# Altium PCB ESP32 with USBC.PcbDoc (part 3 of 3)
Units mil, origin at the board's own origin, x right, y up, seen from the top; angles counter-clockwise.
Board outline 2700 x 1000 mil, 4 copper layers (L1, L2, L3, L4), stack 61.583 mil thick; 64 components, 73 nets, 299 pads, 161 vias.
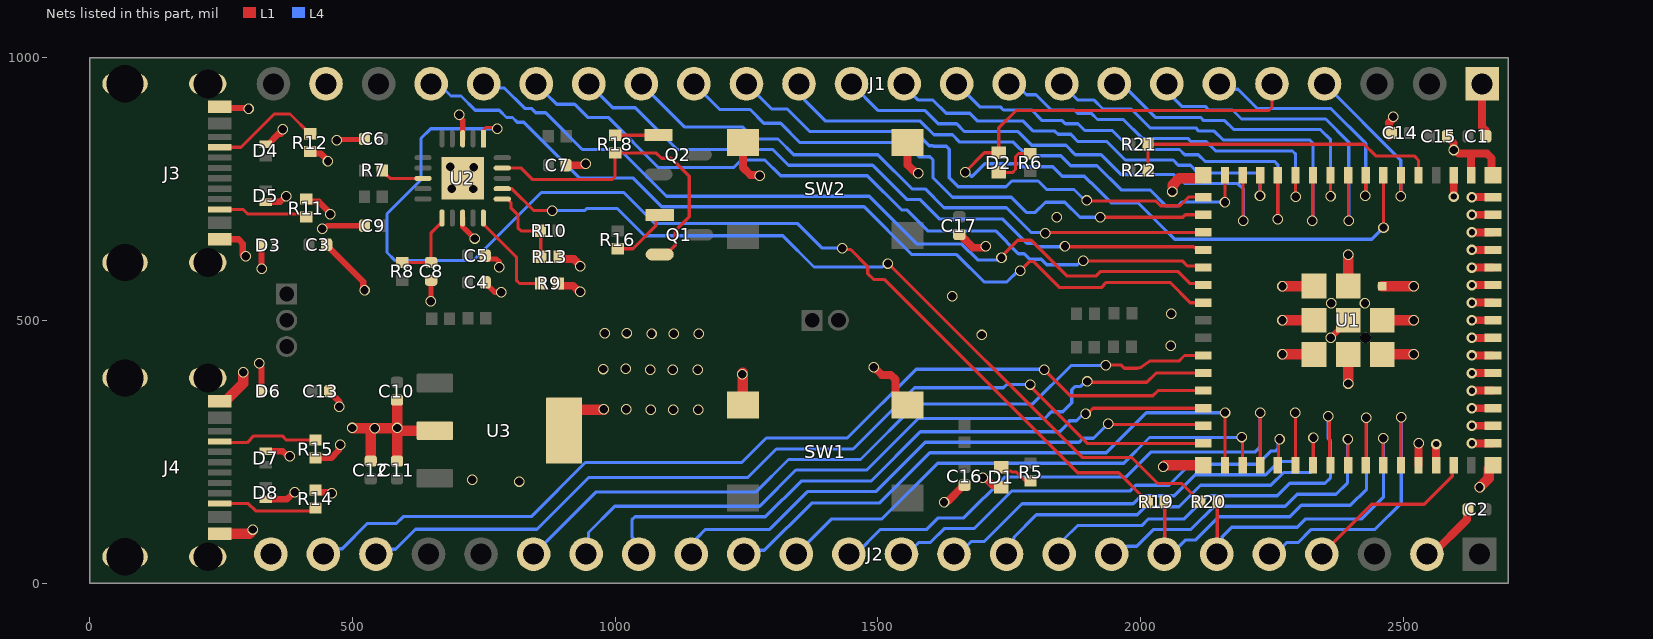
[diagram p4: the nets of this part, all layers, seen from the top]

## Via types
v1: diameter 20, hole 16, L1 to L4, tented both sides, 142 vias
v2: diameter 20, hole 12, L1 to L4, tented both sides, 17 vias
v3: diameter 20, hole 20, L1 to L4, tented both sides, 1 vias
v4: diameter 20, hole 16, L1 to L4, 1 vias

## Nets (pads, with @x,y where several pads share a name; then routed paths per layer and width w, separated by ;. In a path a pad name is that pad's centre, name@x,y a point inside that pad or via, vN(x,y) a via of type N, cw(c..) or ccw(c..) an arc to the next point about the centre after c; other vN are vias at no path point) (continued)
FTDI_USB_P: R7.2 U2.8 | length 84.5
  L1 w6.03: R7.2@557.01,785 557.01,783.82 564.62,776.2 565.8,776.2 572.01,770 579.15,770 U2.8@634.59,770
GND: C1.1 C2.1 C3.1 C4.2 C5.1 C6.1 C7.1 C8.1 C9.1 C10.2 C11.1 C12.1 C13.1 C14.1 C15.1 C16.1 C17.1 D1.1 D3.1 D4.1 D5.2 D6.1 D7.1 D8.2 J1.1 J1.23 J2.2 J2.24 J3.A1B12 J3.B1A12 J3.S1 J3.S2 J3.S3 J3.S4 J4.A1B12 J4.B1A12 J4.S1 J4.S2 J4.S3 J4.S4 R9.2 R11.1 R12.1 R13.1 R14.1 R15.1 SW1.3 SW1.4 SW2.3 SW2.4 U1.1 U1.2 U1.42 U1.43 U1.46 U1.47 U1.48 U1.49 U1.50 U1.51 U1.52 U1.53 U1.54 U1.55 U1.56 U1.57 U1.58 U1.59 U1.60 U1.61 U1.62 U1.63 U1.64 U1.65 U1.66 U1.67 U1.68 U1.69 U1.70 U1.71 U1.72 U1.73 U2.3 U2.13 U2.21 U3.2 U3.4 | length 4192.2
  L1 w10.01: v1@443.63,674.82 447.41,674.82 452.59,680 C9.1@523.07,680 ; v1(470.53,842.78) 471.64,843.89 521.96,843.89 C6.1@523.07,845 ; v1(649.42,535.8) 649.71,536.09 649.71,575.85 C8.1@650,576.14 ; v1(703.41,891.19) 703.41,887.41 710,880.82 U2.3@710,845.41 ; U2.13@710,694.59 710,678 716.24,671.76 732.44,655.56 v1(733.08,655.56) ; C4.2@753,572 753,571.16 770.63,553.53 v1(783.12,553.53) ; C5.1@753,623 753,622.16 758.58,616.58 773.98,616.58 779.84,610.72 v1(779.84,600.94)
  L1 w12: J3.B1A12@247.64,653.94 283.67,653.94 291.8,645.81 291.8,624.02 v1@294.1,621.72 ; J3.A1B12@247.64,905.91 249.54,904 300.62,904 v1(302.52,902.1) ; v1@322.76,418.74 322.76,415.49 327.2,411.04 D6.1@327.2,365 ; D3.1@326.86,642.61 327.07,642.4 327.07,598.42 v1@327.27,598.21 ; D8.2@335,159.41 375.68,159.41 386.32,170.05 v1@389.56,170.05 ; D7.1@335,250.59 367.88,250.59 377.23,241.24 v1@380.48,241.24 ; D5.2@335,724.41 335.89,725.3 362.91,725.3 v1@373.92,736.31 ; D4.1@335,835 339.92,835 359.58,854.66 v1@364.48,854.66 ; R11.1@412.41,730.46 417.04,725.83 436.05,725.83 458.28,703.59 v1@458.28,702.68 ; R12.1@421.18,820.98 424.93,817.23 440.15,817.23 453.18,804.21 v1@453.18,802.08 ; R14.1@430,177.01 431.73,177.01 435.81,172.93 458.88,172.93 v1(461.17,170.63) ; R15.1@430,237.99 459.81,237.99 474.49,252.67 474.49,260.47 v1(476.79,262.77) ; C3.1@451.34,644.03 451.34,642.85 520.98,573.21 520.98,559.3 v1(523.28,557.01) ; C13.1@456.93,365 456.93,363.82 475.34,345.4 v1(475.34,335.48) ; v1(2362,467) U1.61@2395.04,500
  L1 w15: R13.1@893.02,621 893.02,619.82 896.15,616.69 921.62,616.69 926.8,611.51 933.44,604.87 v1(933.44,602.82) v1@933.44,600.77 ; R9.2@895.15,565.69 920.44,565.69 931.59,554.54 v1(934.02,554.54) ; C7.1@906.93,795 941,795 v1(944,798) ; SW2.4@1243.5,838.58 1243.5,790.49 1257.27,776.72 1273.28,776.72 v1(1275,775) ; v1(1492.1,410.27) 1493.45,410.27 1507.57,396.15 1524.7,396.15 1533.48,387.37 1533.48,356.67 1551.57,338.58 SW1.3@1556.5,338.58 ; SW2.3@1556.5,838.58 1556.5,795.79 1565.28,787 1566,787 v1@1570,783 ; v1(1626,154) 1627.72,155.72 1633.4,155.72 1660.69,183.01 1661.87,183.01 C16.1@1665,186.14 ; C17.1@1655,663.07 1656.18,663.07 1681.25,638 v1@1702,638 ; 1710,194.76 1718.46,186.3 1731.3,186.3 D1.1@1735,182.6 ; C14.1@2473.07,850 2473.07,876.21 2481,884.14 v1(2481,887) ; U1.42@2528.9,224.41 v1@2528.9,264.5 ; J2.2@2545,55 2555,55 2621.06,121.06 2621.06,137.98 C2.1@2623.07,140 ; U1.43@2562.36,224.41 v2(2562.36,264.5) ; C15.1@2583.86,850 2583.86,848.82 2596,836.68 v1(2596,824) 2598.44,824 2605.44,817 2627.94,817 ; v2(2595.83,735.5) U1.2@2595.83,775.59 ; U1.1@2629.29,775.59 2628.92,775.96 2628.92,816.02 2627.94,817 ; v2(2630.54,265.75) U1.46@2670.63,265.75 ; v2(2630.54,299.21) U1.47@2670.63,299.21 ; v2(2630.54,332.68) U1.48@2670.63,332.68 ; v2(2630.54,366.14) U1.49@2670.63,366.14 ; v2(2630.54,399.61) U1.50@2670.63,399.61 ; v2(2630.54,433.07) U1.51@2670.63,433.07 ; v2(2630.54,466.54) U1.52@2670.63,466.54 ; v2(2630.54,500) U1.53@2670.63,500 ; v2(2630.54,533.46) U1.54@2670.63,533.46 ; v2(2630.54,566.93) U1.55@2670.63,566.93 ; v2(2630.54,600.39) U1.56@2670.63,600.39 ; v2(2630.54,633.86) U1.57@2670.63,633.86 ; v2(2630.54,667.32) U1.58@2670.63,667.32 ; v2(2630.54,700.79) U1.59@2670.63,700.79 ; v2(2630.54,734.25) U1.60@2670.63,734.25 ; J1.1@2650,950 2650,868 2656,862 2656,850.93 C1.1@2656.93,850 ; U1.65@2662.38,216.16 U1.65@2670.63,224.41 ; U1.62@2670.63,775.59 2668,778.22 2668,808.21 2659.21,817 2627.94,817
  L1 w20: J4.B1A12@247.64,94.09 304.31,94.09 v1@309.6,99.38 ; J4.A1B12@247.64,346.06 258.46,346.06 292.87,380.46 v1@292.87,398.32 ; v1(500.24,295.08) 500.47,294.86 542.68,294.86 v1(542.9,294.63) 543.12,294.86 v1@585.33,294.86 ; C12.1@535,231.93 535,285.65 ; C11.1@585,231.93 585.28,232.21 585.28,294.8 v1@585.33,294.86 ; C10.2@585,348.07 585.28,347.79 585.28,295.36 v1(585.56,295.08) ; U3.2@656.97,290 591.72,290 586.64,295.08 v1(585.56,295.08) ; U3.4@903.03,290 903.03,304.91 927.48,329.36 v1@978.3,329.36 ; v1@1242.85,400.25 1242.85,339.24 SW1.4@1243.5,338.58 ; v1(2043,221) 2046.41,224.41 U1.64@2119.45,224.41 ; v1(2060,745) 2060.77,745.77 2060.77,756.89 2073.72,769.84 2113.7,769.84 U1.63@2119.45,775.59 ; v1(2270,565) v1(2270,565) U1.71@2330.08,564.96 ; v1@2270.04,435.04 U1.73@2330.08,435.04 ; v1(2270,500.04) U1.72@2330.08,500 ; v1(2395.07,379.65) U1.70@2395.05,435.02 ; U1.69@2395.04,564.96 v1@2395.04,625 ; U1.68@2460,435.04 v1@2520.04,435.04 ; U1.67@2460,500 v1@2520.04,500 ; U1.66@2460,564.96 v1@2520.04,564.96 ; v1(2645,182) 2662.38,199.38 U1.65@2662.38,216.16 ; v1@585.33,294.86 v1(585.56,295.08)
  other v1: 310.27,101.77 390.14,172.48 817.82,193.11 728.5,196.85 1700,200 380.67,241.62 2529.05,265.92 1068.05,329.68 1110.64,329.84 1158.26,329.68 978.63,330.88 1021.23,331.04 1241.64,397.29 292.78,400.94 1066.93,406.03 1109.52,406.19 1157.14,406.03 977.51,407.22 1020.11,407.38 322.89,418.55 2270,435.08 2520.08,435 2057.07,451.18 1698.03,472.04 1069.42,474.37 1159.64,474.37 1112.02,474.53 980.01,475.57 1022.61,475.73 2520.08,499.96 2058.01,512.69 2363,532 2427,532 1641.88,546.06 2520.08,564.92 327.45,598.26 296.93,621.51 2395.08,625.04 1705.12,640.98 442.94,674.44 1840.51,696.32 458.41,701.49 374.63,736.23 689.1,750.31 730.53,749.75 1577,780 730.72,791.18 686.12,792.11 453.73,802.42 367.93,863.58
  other v3: 2428,467
GPIO0: R21.2 R22.2 U1.4 | length 606.3
  L1 w6: R22.2@2014.02,785 R21.2@2014.02,835 2425.14,835 2447.41,812.72 2520.41,812.72 2528.9,804.24 U1.4@2528.9,775.59
GPIO1: J1.4 U1.5 | length 318.3
  L1 w6: U1.5@2495.43,775.59 2495.32,775.47 2495.32,735.79 2495.2,735.67 v1@2498.99,735.67
  L4 w6: J1.4@2350,950 2495.2,804.8 v1@2495.2,735.67
  other v1: 2495.42,735.6
GPIO2: D2.1 J1.5 U1.6 | length 1684.9
  L1 w6: v1(1666,782) 1702.7,818.7 D2.1@1730,818.7 1730,866 1763.11,899.11 2244.14,899.11 2250,904.97 J1.5@2250,950 ; v1@2461.97,675.96 U1.6@2461.97,775.59
  L4 w6: v1(1666,782) 1669.79,782 1677.79,774 1680,774 1703.72,797.72 1770.02,797.72 1775.74,792 1833,792 1851,774 1893,774 1905,762 1906,762 1945,723 1996,723 2047.21,671.79 ; 2047.23,671.79 2064.85,654.17 2440.17,654.17 v1@2461.97,675.96
  other v1: 2462.24,676.48
GPIO3: J1.6 U1.7 | length 467.3
  L1 w6: U1.7@2428.5,775.59 2428.5,735.5 v1@2429,735
  L4 w6: J1.6@2150,950 2160.33,939.67 2185.33,939.67 2222,903 2362,903 2428.5,836.5 v1@2428.5,735.5
  other v1: 2427.32,736.6
GPIO4: J1.7 U1.8 | length 635.8
  L1 w6: U1.8@2395.04,775.59 2395.52,775.11 2395.52,690.48 v1@2396,690
  L4 w6: J1.7@2050,950 2050,935.39 2065.73,919.65 2065.73,919.27 2078,907 2123,907 2130,900 2175,900 2192,883 2352,883 2396,839 v1@2396,690
  other v1: 2396.38,689.45
GPIO5: J1.8 U1.9 | length 603.7
  L1 w6: v1@2361.57,735.5 U1.9@2361.57,775.59
  L4 w6: J1.8@1950,950 1964.14,950 2028.14,886 2114,886 2120,880 2160,880 2177,863 2342,863 2361.57,843.43 v1@2361.57,735.5
  other v1: 2361.45,735.6
GPIO6: J1.9 U1.10 | length 756.5
  L1 w6: v1@2327,691 2327.56,691.56 2327.56,775.04 U1.10@2328.11,775.59
  L4 w6: J1.9@1850,950 1881,919 1911.5,919 1928.5,902 1982,902 2018,866 2105,866 2111,860 2140,860 2157,843 2322.25,843 2328.11,837.14 2328.11,692.11 v1@2327,691
  other v1: 2326.78,689.7
GPIO7: J1.10 U1.11 | length 721.3
  L1 w6: v1@2294.65,735.5 U1.11@2294.65,775.59
  L4 w6: J1.10@1750,950 1761.86,950 1782.86,929 1801,929 1830,900 1874,900 1880,894 1906,894 1918,882 1967,882 2003,846 2090,846 2096,840 2125,840 2143,822 2289.14,822 2295,816.14 2295,735.85 v1@2294.65,735.5
  other v1: 2295.09,735.1
GPIO8: J1.11 U1.12 | length 863.6
  L1 w6: v1@2260,692 2260.59,692.59 2260.59,775 U1.12@2261.18,775.59
  L4 w6: J1.11@1650,950 1694,906 1733,906 1739,900 1793,900 1813,880 1851,880 1857,874 1881,874 1894,861 1946,861 1982,825 2074,825 2084,815 2110,815 2123,802 2255.32,802 2261.18,796.14 2261.18,693.18 v1@2260,692
  other v1: 2261.16,692.19
GPIO9: J1.12 U1.13 | length 831.5
  L1 w6: v1@2227.72,735.5 U1.13@2227.72,775.59
  L4 w6: J1.12@1550,950 1550,946.18 1577.18,919 1605,919 1630,894 1675,894 1690,879 1777,879 1796,860 1837,860 1843,854 1867,854 1881,840 1936,840 1971,805 2062,805 2072,795 2095,795 2110,780 2221.86,780 2227.72,774.14 v1@2227.72,735.5
  other v1: 2227.23,736.6
GPIO10: J1.13 U1.14 | length 976.6
  L1 w6: U1.14@2194.25,775.59 2195.13,774.72 2195.13,689.87 v1@2196,689
  L4 w6: J1.13@1450,950 1501,899 1590,899 1615,874 1650,874 1665,859 1767,859 1793,833 1858,833 1876,815 1925,815 1962.92,777.08 2063.12,777.08 2070.2,770 2075,770 2085,760 2185,760 2196,749 v1@2196,689
  other v1: 2195.55,689.45
GPIO11: J1.14 U1.15 | length 975.5
  L1 w6: v1@2160.79,720.79 U1.15@2160.79,775.59
  L4 w6: J1.14@1350,950 1360.33,939.67 1360.33,919.67 1401,879 1581,879 1607,853 1642,853 1656,839 1758,839 1784,813 1848,813 1867,794 1917,794 1963,748 2018,748 2048,718 2071.14,718 2078.14,725 v1@2160,725
  other v1: 2160.62,724.63
GPIO12: J1.15 U1.16 | length 1013.1
  L1 w6: v1@1897,727 2029,727 2038,718 2075,718 2091.25,734.25 U1.16@2119.45,734.25
  L4 w6: J1.15@1250,950 1298,902 1328,902 1371,859 1571,859 1598,832 1605,832 1606,831 1630.14,831 1636,825.14 1636,771 1653,754 1744,754 1755,765 1805,765 1821.1,748.9 1873.24,748.9 1895.14,727 v1@1897,727
  other v1: 1897.72,727.94
GPIO13: J1.16 U1.17 | length 1112.7
  L1 w6: v1@1923,696 2080.4,696 2085.18,700.79 U1.17@2119.45,700.79
  L4 w6: J1.16@1150,950 1199,901 1257,901 1283,875 1315,875 1352,838 1552,838 1578.98,811.02 1599.14,811.02 1605,805.17 1605,771 1642,734 1754,734 1782.64,705.36 1799.76,705.36 1819.1,724.7 1855.97,724.7 1884.67,696 v1@1923,696
  other v1: 1923.19,695.75
GPIO14: J1.17 U1.18 | length 1186.7
  L1 w6: v1@1819.03,667.11 1819.24,667.32 U1.18@2119.45,667.32
  L4 w6: J1.17@1050,950 1132,868 1242,868 1265,845 1310,845 1340,815 1500,815 1565,750 1590,750 1626,714 1744.93,714 1791.82,667.11 v1@1819.03,667.11
  other v1: 1818.84,665.4
GPIO15: J1.18 U1.19 | length 1300.4
  L1 w6: v1@1857,640 2100.98,640 2104.25,636.73 2116.57,636.73 U1.19@2119.45,633.86
  L4 w6: J1.18@950,950 995.6,904.4 1038.6,904.4 1118,825 1300,825 1330,795 1490,795 1555,730 1580,730 1617,693 1737,693 1783.65,646.35 1797.45,646.35 1803.8,640 v1@1857,640
  other v1: 1856.11,640.82
GPIO16: J1.19 U1.20 | length 1427.6
  L1 w6: v1@1891,613 2079.28,613 2089.02,603.27 2108.7,603.27 2111.57,600.39 U1.20@2119.45,600.39
  L4 w6: J1.19@867.71,952.54 867.71,932.29 889,911 923,911 948,886 987,886 1082.64,790.36 1225.36,790.36 1240,805 1285,805 1315,775 1480,775 1545,710 1555,710 1594.97,670.03 1724.11,670.03 1767.43,626.71 1778.47,626.71 1789.11,616.07 1811.18,616.07 1821.47,605.78 1879.99,605.78 1887.21,613 v1@1891,613
  other v1: 1890.73,613.6
GPIO17: J1.20 U1.21 | length 1564.3
  L1 w6: v1@1734.78,617.66 1734.78,620.79 1766.3,652.31 1791.81,652.31 1860.12,584 1915,584 1924,593 2071,593 2094.2,569.8 U1.21@2116.57,569.8
  L4 w6: J1.20@750,950 757.73,942.27 788.73,942.27 827.87,903.13 840.77,903.13 848.88,895.01 867.88,895.01 937.89,825 1009,825 1098,736 1484,736 1575,645 1660,645 1690.01,614.99 1732.1,614.99 v1@1734.78,617.66
  other v1: 1735.35,619.34
GPIO18: J1.21 U1.22 | length 1696.8
  L1 w6: v1(1770.97,594.27) 1788.28,611.58 1796.56,611.58 1845.96,562.17 1925.17,562.17 1935,572 2056,572 2094.54,533.46 U1.22@2119.45,533.46
  L4 w6: J1.21@660.23,939.77 J1.21@650,950 664.61,950 687.91,926.7 706.81,926.7 733.95,899.56 779.53,899.56 793.31,885.78 804.89,885.78 813.83,876.84 826.16,876.84 932,771 1034,771 1089,716 1474,716 1565,625 1650,625 1702.27,572.73 1745.65,572.73 1767.18,594.27 v1(1770.97,594.27)
GPIO21: J2.19 U1.25 | length 1434.4
  L1 w6: v1(1933.53,414.61) 1963.25,414.61 1969.19,408.67 1993.53,408.67 1996.64,409.16 2001.02,410.59 2016.87,422.18 2072.73,422.18 2083.62,433.07 U1.25@2119.45,433.07
  L4 w6: J2.19@845,55 963,173 1268,173 1330,235 1467,235 1572.78,340.78 1794.98,340.78 1868.01,413.81 1932.73,413.81 v1(1933.53,414.61)
GPIO26: J2.18 U1.26 | length 1354.4
  L1 w6: v1(1898.54,383.54) 1900.08,382 2012,382 2029.61,399.61 U1.26@2119.45,399.61
  L4 w6: J2.18@945,55 949.56,59.56 949.56,96.14 999.41,146 1275,146 1344,215 1479,215 1577.07,313.07 1817.49,313.07 1830.19,325.77 1851.87,325.77 1869.03,342.94 1869.03,367.79 1874.89,373.65 1884.87,373.65 1894.76,383.54 v1(1898.54,383.54)
GPIO33: J2.17 U1.28 | length 1248
  L1 w6: v1(1895.26,322.23) 1899.04,322.23 1909.49,332.68 U1.28@2119.45,332.68
  L4 w6: J2.17@1045,55 1034.67,65.33 1034.67,85.19 1032,87.86 1032,120.14 1037.86,126 1286,126 1354,194 1487,194 1581,288 1846.14,288 1863.47,305.32 1863.47,308.77 1878,308.77 1891.47,322.23 v1(1895.26,322.23)
GPIO34: J2.16 U1.29 | length 1090.8
  L1 w6: v1(1938.24,303.44) 1940.36,301.33 2117.33,301.33 U1.29@2119.45,299.21
  L4 w6: J2.16@1145,55 1155.33,65.33 1155.33,85.27 1172.06,102 1294,102 1366,174 1496,174 1590,268 1883,268 1890.53,275.53 1910.32,275.53 v1(1938.24,303.44)
GPIO35: J2.15 U1.31 | length 1126.9
  L1 w6: U1.31@2160.79,224.41 v1@2160.79,324.04
  L4 w6: J2.15@1245,55 1252.23,62.23 1284.23,62.23 1374,152 1503,152 1599,248 1935,248 2011.04,324.04 v1@2160.79,324.04
  other v1: 2160.66,324.43
GPIO36: J2.14 U1.32 | length 993.7
  L1 w6: v1@2194,277 2194.13,276.87 2194.13,224.54 U1.32@2194.25,224.41
  L4 w6: J2.14@1345,55 1412,122 1508,122 1614,228 1968,228 2017,277 v1@2194,277
  other v1: 2192.29,277.85
GPIO37: J2.13 U1.33 | length 1031.7
  L1 w6: U1.33@2227.72,224.41 v1@2227.72,324.04
  L4 w6: J2.13@1445,55 1458,55 1505,102 1593,102 1615,124 1663.83,124 1741.41,201.58 1971.58,201.58 2019,249 2217.39,249 2227.72,259.32 v1@2227.72,324.04
  other v1: 2227.41,324.2
GPIO38: J2.12 U1.34 | length 871.3
  L1 w6: U1.34@2261.18,224.41 2262.59,225.82 2262.59,273.59 v1@2264,275
  L4 w6: J2.12@1545,55 1555.86,55 1577.86,77 1600,77 1627,104 1683.94,104 1755.38,175.43 1980.43,175.43 1991,186 2054,186 2094,226 2222.68,226 2247.68,251 2256.14,251 2262,256.86 2262,273 v1@2264,275
  other v1: 2264.41,273.82
GPIO39: J2.11 U1.35 | length 911.8
  L1 w6: U1.35@2294.65,224.41 v1@2294.65,324.04
  L4 w6: J2.11@1645,55 1653.86,55 1677.86,79 1702.53,79 1774.3,150.77 1985.77,150.77 2001,166 2064,166 2104,206 2238,206 2263,231 2288.79,231 2294.65,236.86 v1@2294.65,324.04
  other v1: 2294.17,324.2
GPIO40: J2.10 U1.36 | length 771.4
  L1 w6: U1.36@2328.11,224.41 2328.56,224.85 2328.56,274.56 v1@2329,275
  L4 w6: J2.10@1745,55 1745,69.61 1759.12,83.73 1759.12,87.35 1801.73,129.97 1993.97,129.97 2009,145 2073,145 2114,186 2248,186 2272,210 2323.14,210 2329,215.86 v1@2329,275
  other v1: 2328.99,276.1
GPIO41: J2.9 U1.37 | length 798.6
  L1 w6: v1@2357.22,315.94 2359.4,313.76 2359.4,226.59 U1.37@2361.57,224.41
  L4 w6: J2.9@1845,55 1855.33,65.33 1855.33,84.61 1879.89,109.17 2002.17,109.17 2015,122 2083,122 2127,166 2260,166 2284,190 2350.97,190 2361.57,200.61 2361.57,270.54 2357.22,274.9 v1@2357.22,315.94
  other v1: 2357.34,316.98
GPIO42: J2.8 U1.38 | length 636.3
  L1 w6: v1@2394,273 2394.52,272.48 2394.52,224.93 U1.38@2395.04,224.41
  L4 w6: J2.8@1945,55 1959.61,55 1974.61,70 1993,70 2025,102 2096,102 2140,146 2275,146 2298,169 2371.88,169 2394,191.12 v1@2394,273
  other v1: 2394.61,273.64
GPIO45: J2.5 U1.41 | length 544.7
  L1 w6: U1.41@2495.43,224.41 2495.79,224.77 2495.79,314.38 v1@2496.15,314.74
  L4 w6: J2.5@2245,55 2255.76,55 2277.86,77.1 2300.1,77.1 2325,102 2446.19,102 2496.15,151.96 v1@2496.15,314.74
  other v1: 2496.34,315.82
GPIO46: J2.4 U1.44 | length 331.9
  L1 w6: J2.4@2345,55 2440,150 2540,150 2592.95,202.95 2592.95,221.54 U1.44@2595.83,224.41
GPIO47: J2.23 U1.27 | length 1845.2
  L1 w6: v1(1816.88,405.69) 1866.29,356.28 2023.28,356.28 2033.14,366.14 U1.27@2119.45,366.14
  L4 w6: J2.23@445,55 455.33,65.33 480.76,65.33 528.99,113.56 584.05,113.56 596.91,126.42 840.56,126.42 943.43,229.28 1241.28,229.28 1288,276 1442.16,276 1572.93,406.77 1815.8,406.77 v1(1816.88,405.69)
GPIO48: J2.22 U1.30 | length 1756.4
  L1 w6: v1(1789.71,377.7) 1789.71,374.47 1871.87,292.3 1872.09,292.3 1898.64,265.75 U1.30@2119.45,265.75
  L4 w6: J2.22@545,55 554.23,64.23 582.23,64.23 620.35,102.35 851.35,102.35 949.8,200.8 1252.8,200.8 1307,255 1453,255 1569.69,371.69 1739,371.69 1745.01,377.7 v1(1789.71,377.7)
NetC8_2: C8.2 R8.2 U2.11 | length 150.5
  L1 w6: R8.2@595,610 C8.2@650,610 650,662.31 650,666.67 666.39,683.06 670.4,683.06 670.63,683.28 U2.11@670.63,694.59
NetD1_2: D1.2 R5.1 | length 61.3
  L1 w6: D1.2@1735,220 1741.81,213.19 1753.04,213.19 1755.03,211.2 1763.38,211.2 1783.26,191.32 R5.1@1784.44,191.32
NetD2_2: D2.2 R6.1 | length 89.3
  L1 w6: D2.2@1730,781.3 1730.3,781 1756.14,781 1762,786.86 1762,811.15 1767.86,817.01 R6.1@1790,817.01
NetJ3_A5: J3.A5 R12.2 | length 214.1
  L1 w6: J3.A5@247.64,829.13 288.12,829.13 351.43,892.44 381.38,892.44 418.82,855 R12.2@420,855
NetJ3_B5: J3.B5 R11.2 | length 170.8
  L1 w6: J3.B5@247.64,711.02 291.98,711.02 300.64,702.36 399.75,702.36 400.03,702.07 406.78,702.07 R11.2@412.41,696.44
NetJ4_A5: J4.A5 R15.2 | length 193.5
  L1 w6: J4.A5@247.64,269.29 247.64,267.57 247.32,267.26 299.93,267.26 312.71,280.03 366.75,280.03 374.77,272.01 R15.2@430,272.01
NetJ4_B5: J4.B5 R14.2 | length 190.4
  L1 w6: J4.B5@247.64,151.18 302.13,151.18 315.95,137.36 325.47,137.36 424.37,137.36 R14.2@430,142.99
NetQ1_1: Q1.1 R16.1 | length 114.8
  L1 w6: R16.1@1005,635.98 1034.12,635.98 1077.74,679.6 1077.74,693.74 1084,700 Q1.1@1085,700
NetQ2_1: Q2.1 R18.1 | length 82.7
  L1 w6: R18.1@1000,852.01 1000.2,852.2 1082.38,852.2 Q2.1@1082.58,852.4
NetR9_1: R9.1 U2.15 | length 192.9
  L1 w6: U2.15@749.37,694.59 749.37,683.28 812.28,620.37 812.28,575.86 818.14,570 R9.1@858,570
RTS_FTDI: Q1.2 R18.2 U2.19 | length 609.4
  L1 w6: U2.19@785.41,789.68 785.64,789.91 806.94,789.91 807.03,790 820.8,790 843.26,767.55 994.14,767.55 1000,773.41 R18.2@1000,817.99 1078.67,817.99 1088.4,808.26 1106.72,808.26 1141.09,773.9 1141.09,696.87 1114.39,670.18 1114.39,642.53 1097.06,625.2 Q1.2@1085,625.2
RXD_FTDI: R19.2 U2.1 | length 2201.4
  L1 w6: U2.1@749.37,845.41 749.37,861.09 755.23,866.95 773.41,866.95 v1(775.94,864.42) ; v1(1432.65,637.39) 1435.33,634.71 1448.14,634.71 1480.73,602.12 1480.73,588.81 1491.69,577.86 1512.04,577.86 1880.19,209.72 1958.28,209.72 2006.18,161.81 2007.36,161.81 2012.99,156.18 R19.2@2012.99,155
  L4 w6: v1(775.94,864.42) 649.1,864.42 630.72,846.04 630.72,767.24 565.92,702.45 565.92,628.99 581,613.91 730.58,613.91 859.79,743.12 1016.84,743.12 1076.01,683.95 1347.92,683.95 1394.47,637.39 v1(1432.65,637.39)
TXD_FTDI: R20.2 U2.17 | length 1582.9
  L1 w6: U2.17@785.41,750.32 803.53,750.32 845.09,708.76 v1(880.2,708.76) ; v1@1519.81,607.98 1888.81,238.98 1921.71,238.98 1921.88,238.81 1982.98,238.81 2032.39,189.39 2078.6,189.39 2106.18,161.81 2107.36,161.81 2112.99,156.18 R20.2@2112.99,155
  L4 w6: v1(880.2,708.76) 942.46,708.76 946.06,712.35 1004.53,712.35 1056.11,660.77 1318.98,660.77 1378.48,601.27 1508.84,601.27 1515.55,607.98 v1(1519.34,607.98)
U0RXD: J2.6 R20.1 U1.40 | length 637.1
  L1 w6: J2.6@2145,55 2146,56 2146,154 R20.1@2147.01,155 ; v1@2461,274 2461.48,273.52 2461.48,224.89 U1.40@2461.97,224.41
  L4 w6: J2.6@2145,55 2155.33,65.33 2155.33,87.92 2173.41,106 2298,106 2314,122 2420.92,122 2461.97,163.05 2461.97,273.03 v1@2461,274
  other v1: 2461.64,275.75
U0TXD: J2.7 R19.1 U1.39 | length 763.1
  L1 w6: J2.7@2045,55 2046,56 2046,154 R19.1@2047.01,155 ; U1.39@2428.5,224.41 2429.27,225.18 2429.27,313.49 v1@2430.04,314.26
  L4 w6: J2.7@2045,55 2059,55 2086,82 2105,82 2149,126 2284,126 2306,148 2399.26,148 2430.04,178.78 v1@2430.04,314.26
  other v1: 2429.05,314.67
VBUS_SENSE: R10.1 R13.2 U2.16 | length 168.4
  L1 w6: U2.16@785.41,730.63 796.72,730.63 796.94,730.4 796.94,728.89 801.82,724.01 801.82,714.22 813.16,702.88 815.17,700.87 815.17,675.86 818.46,672.57 821.03,670 R10.1@857.99,670 858.5,669.5 858.5,621.5 R13.2@859,621
pads on no net: J1.24 J3.A8 J3.B8 J4.A8 J4.B8 U2.2 U2.4 U2.5 U2.6 U2.7 U2.14

## Polygon pours and split planes (outlines as drawn)
GND on L1 "GND_L01_P013" (solid, pour order 13): 1182.24,141.88 1182.24,149.47 1182.24,502.49 972.2,502.49 922.17,452.45 922.17,451.82 870.53,451.82 766.38,347.66 605.78,347.66 604.56,348.89 601.93,348.89 601.93,352.5 595.21,359.23 573.51,359.23 509.28,357.98 487.39,308.87 487.39,291.64 503.53,247.86 515.67,223.36 518.34,220.7 601.85,220.7 611.42,230.27 713.84,230.27 738.47,254.9 821.31,254.9 841.3,227.45 846.11,144.03 846.3,143.84
GND on L1 "GND_L01_P012" (solid, pour order 12): 2253.23,639.71 2534.64,639.71 2534.64,366.84 2534.39,366.59 2253.87,366.59
+5V_VBUS2 on L1 "+5V_VBUS2_L01_P011" (solid, pour order 11): 348.78,470.13 386.68,470.13 434.34,418.93 434.34,416.13 434.34,415.18 434.34,303.18 349.73,303.18 344.59,303.47 344.14,303.47 343.96,469.43 343.96,469.91
+5V_VBUS1 on L1 "+5V_VBUS1_L01_P010" (solid, pour order 10): 352.09,529.39 429.23,529.39 429.41,529.57 428.99,529.99 428.99,657.02 404.07,668.3 344.61,676.73 344.29,676.4 344.48,676.21 344.48,624.15 352.6,616.02 352.6,529.86
+5V on L1 "+5V_L01_P008" (solid, pour order 8): 694.26,400.9 694.15,400.79 564.69,400.79 562.99,399.09 562.22,399.86 536.17,399.86 415.82,520.21 360.19,520.21 353.09,510.21 353.09,506.66 353.09,485.74 354.18,485.33 357.8,483.88 361.49,482.39 363.14,481.35 364.58,479.91 404.81,479.91 404.84,479.94 405.89,479.94 514.78,371.05 603.39,371.05 612.65,361.79 693.32,361.79 694.13,362.59
+3V3_REG on L1 "+3V3_REG_L01_P007" (solid, pour order 7): 692.47,218.28 692.74,218.28 693.04,157.8 690.9,157.8 613.37,157.8 595.56,140 490.25,140 490.25,162.32 494.64,166.7 521.28,166.7 521.28,209.3 610.7,209.3 620.88,217.58 624.96,218.28 689.77,218.28 691.49,218.28
+3V3_FTDI on L1 "+3V3_FTDI_L01_P006" (solid, pour order 6): 607.27,588.27 606.91,564.33 577.31,564.33 544.6,597.04 545.72,689.25 560.9,701.22 589.24,728.12 595.24,734.69 596.82,736.24 598.51,737.14 601.53,730.41 607.27,702.26 607.79,701.74 620.91,700.74 622.79,700.37 628.77,691.15 628.77,684.16 628.77,678 626.68,675.91 626.68,652.31 606.57,632.2 579.18,628.41 575.04,628.49 568.59,620.73 568.59,602.74 568.85,596.8 576.37,591.03 582.94,590.83 604.79,588.27
+3V3_FTDI on L1 "+3V3_FTDI_L01_P005" (solid, pour order 5): 859.68,863.57 859.89,863.36 884.87,863.36 884.87,780.63 884.87,781.92 883.81,781.92 848.07,782.98 825.25,804.43 787.07,804.43 787.07,843.7 806.89,863.52 858.93,863.52
+3V3 on L1 "+3V3_L01_P004" (solid, pour order 4): 2499.61,866.07 2498.05,838.18 2561.78,835.26 2561.11,863.52 2561.19,864.36 2561.78,870.22 2565.8,874.25 2568.4,879.1 2568.4,889.41 2559.38,898.42 2503.94,898.42 2503.94,870.4
GND on L2 "GND_L02_P016" (solid, remove dead copper, pour order 16): 5.28,6.04 5.36,4.58 2695.55,4.58 2695.55,998.42 2693.78,996.66 5.19,996.66 5.19,8.88
+3V3 on L2 "+3V3_L02_P014" (solid, pour order 14): 2683.3,22.44 2687.95,27.09 2687.95,984.18 915.17,984.18 917.89,981.45 917.89,835.39 1078.48,835.39 1220.8,693.07 1298.47,693.07 1298.47,632.78 1298.47,591.2 1328.6,561.07 1393.93,561.07 1404.21,550.79 1404.21,479.06 1446.07,479.06 1450.27,483.25 1450.27,576.74 1407.97,619.03 1366.82,619.03 1366.82,684.88 1371.35,689.41 1793.87,689.41 1793.87,693.07 1906.57,805.77 2512.28,805.77 2512.28,795.03 2527.09,780.22 2527.09,623.99 2558.16,592.91 2555.22,589.98 2555.22,208.59 2532.96,186.33 2317.72,186.33 2305.3,173.91 2308.78,170.44 2308.78,19.06 2679.87,19.06 2683.3,22.48
+3V3_REG on L2 "+3V3_REG_L02_P015" (solid, pour order 15): 492.48,136.21 492.88,136.38 698.78,136.38 704.28,141.88 703.52,142.64 703.52,218.51 515.61,218.51 514.18,217.07 514.18,189.42 492.66,164.95 490.58,138.11
GND on L3 (split plane): 2699.95,0.05 0.05,0.05 0.05,999.95 2699.95,999.95

## Silkscreen, mask and mechanical layers (free items; w line width, h text height)
Top Overlay:
  lines w6: 743.96,102.02 743.96,119.5 ; 749.16,887.82 749.16,903.17 ; 1245.96,103.55 1245.96,123.55 ; 1248.78,883.05 1248.78,902.85 ; 1747.31,103.92 1747.31,124.97 ; 1751.6,882.84 1751.6,900.38 ; 2244.78,105.61 2244.78,140.73 ; 2253.84,882.59 2253.84,900.82
  text "J1" at 2324.1,849.38 h40
  text "USER" at 1725.9,692.87 h35
  text "BOOT/USER" at 1264.84,576.04 h35
  text "USB1" at 433.76,548.41 h35
  text "UART" at 46.18,528.19 h35
  text "+5V" at 438.43,481.77 h35
  text "3V3" at 1493.49,480.17 h35
  text "REG" at 1203.31,477.17 h35
  text "ESP" at 42.62,431.66 h35
  text "USB2" at 436,419.91 h35
  text "RESET" at 1311.62,393.68 h35
  text "POWER" at 1734.45,282.59 h35
  text "J2" at 2303.48,107.26 h40
Bottom Overlay:
  text "I017" at 761.14,879.19 h40 r90
  text "I016" at 864.71,877.73 h40 r90
  text "I013" at 1163.94,878.18 h40 r90
  text "I09" at 1566.49,877.78 h40 r90
  text "I08" at 1661.74,877.71 h40 r90
  text "I012" at 1264.27,876.97 h40 r90
  text "I011" at 1363,877.38 h40 r90
  text "5V" at 556.74,876.09 h40 r90
  text "I014" at 1063.55,875.77 h40 r90
  text "GND" at 2673.56,876.04 h40 r90
  text "GND" at 459.34,875.12 h40 r90
  text "I018" at 658.84,875.44 h40 r90
  text "I015" at 963.89,874.79 h40 r90
  text "I010" at 1463.74,874.15 h40 r90
  text "I04" at 2068.94,874.32 h40 r90
  text "NC" at 359.06,872.84 h40 r90
  text "I07" at 1762.93,872.86 h40 r90
  text "I03" at 2164.8,873.35 h40 r90
  text "I05" at 1968.71,872.38 h40 r90
  text "I00" at 2469.84,871.41 h40 r90
  text "3V3" at 2565.22,871.41 h40 r90
  text "I06" at 1860.25,870.44 h40 r90
  text "I02" at 2260.19,870.44 h40 r90
  text "I01" at 2366.71,868.51 h40 r90
  text "<--PIN-->" at 2672.35,694.04 h40 r90
  text "(c) 2024 Md Firoz Mahmud" at 2192.52,540.13 h70
  text "firoz.eee13@gmail.com" at 1792.68,432.65 h40
  text "2564686912" at 1607.72,353.04 h40
  text "USB-" at 668.33,271.63 h40 r90
  text "USB+" at 763.53,270.03 h40 r90
  text "GND" at 370,265 h40 r90
  text "I047" at 470,265 h40 r90
  text "I048" at 570,265 h40 r90
  text "I021" at 870,265 h40 r90
  text "I026" at 970,265 h40 r90
  text "I033" at 1070,265 h40 r90
  text "I034" at 1170,265 h40 r90
  text "I035" at 1270,265 h40 r90
  text "I036" at 1370,265 h40 r90
  text "I037" at 1470,265 h40 r90
  text "I038" at 1570,265 h40 r90
  text "I039" at 1670,265 h40 r90
  text "I040" at 1770,265 h40 r90
  text "I041" at 1869.5,265.26 h40 r90
  text "I042" at 1970,265 h40 r90
  text "TXD" at 2070,265 h40 r90
  text "RXD" at 2170,265 h40 r90
  text "I045" at 2270,265 h40 r90
  text "I046" at 2370,265 h40 r90
  text "EN" at 2470,265 h40 r90
  text "3V3" at 2670,265 h40 r90
  text "GND" at 2564.04,257.07 h40 r90
Board Shape:
  lines w20: -1.95,996.67 -4.84,999.55 ; -4.84,999.55 -4.84,5.06 -1.95,2.17 2703.56,2.17 2708.7,7.3 2708.7,1002.8 2705.44,999.55 -4.84,999.55

## Text inside footprints (layer, text, board x,y; h text height)
J1: Bottom Overlay "1" at 2633.09,1019.35 h40 r270
J2: Bottom Overlay "1" at 2644,-37 h40 r270
J5: Top Overlay "1" at 302,532 h40